# Altium PCB PCB2.PcbDoc
Units mm, origin at the board's own origin, x right, y up, seen from the top; angles counter-clockwise.
Board outline 60 x 60 mm, 2 copper layers (Top Layer, Bottom Layer); 28 components, 24 nets, 80 pads, 3 vias.
Unrouted connection lines stored in the file: 1.
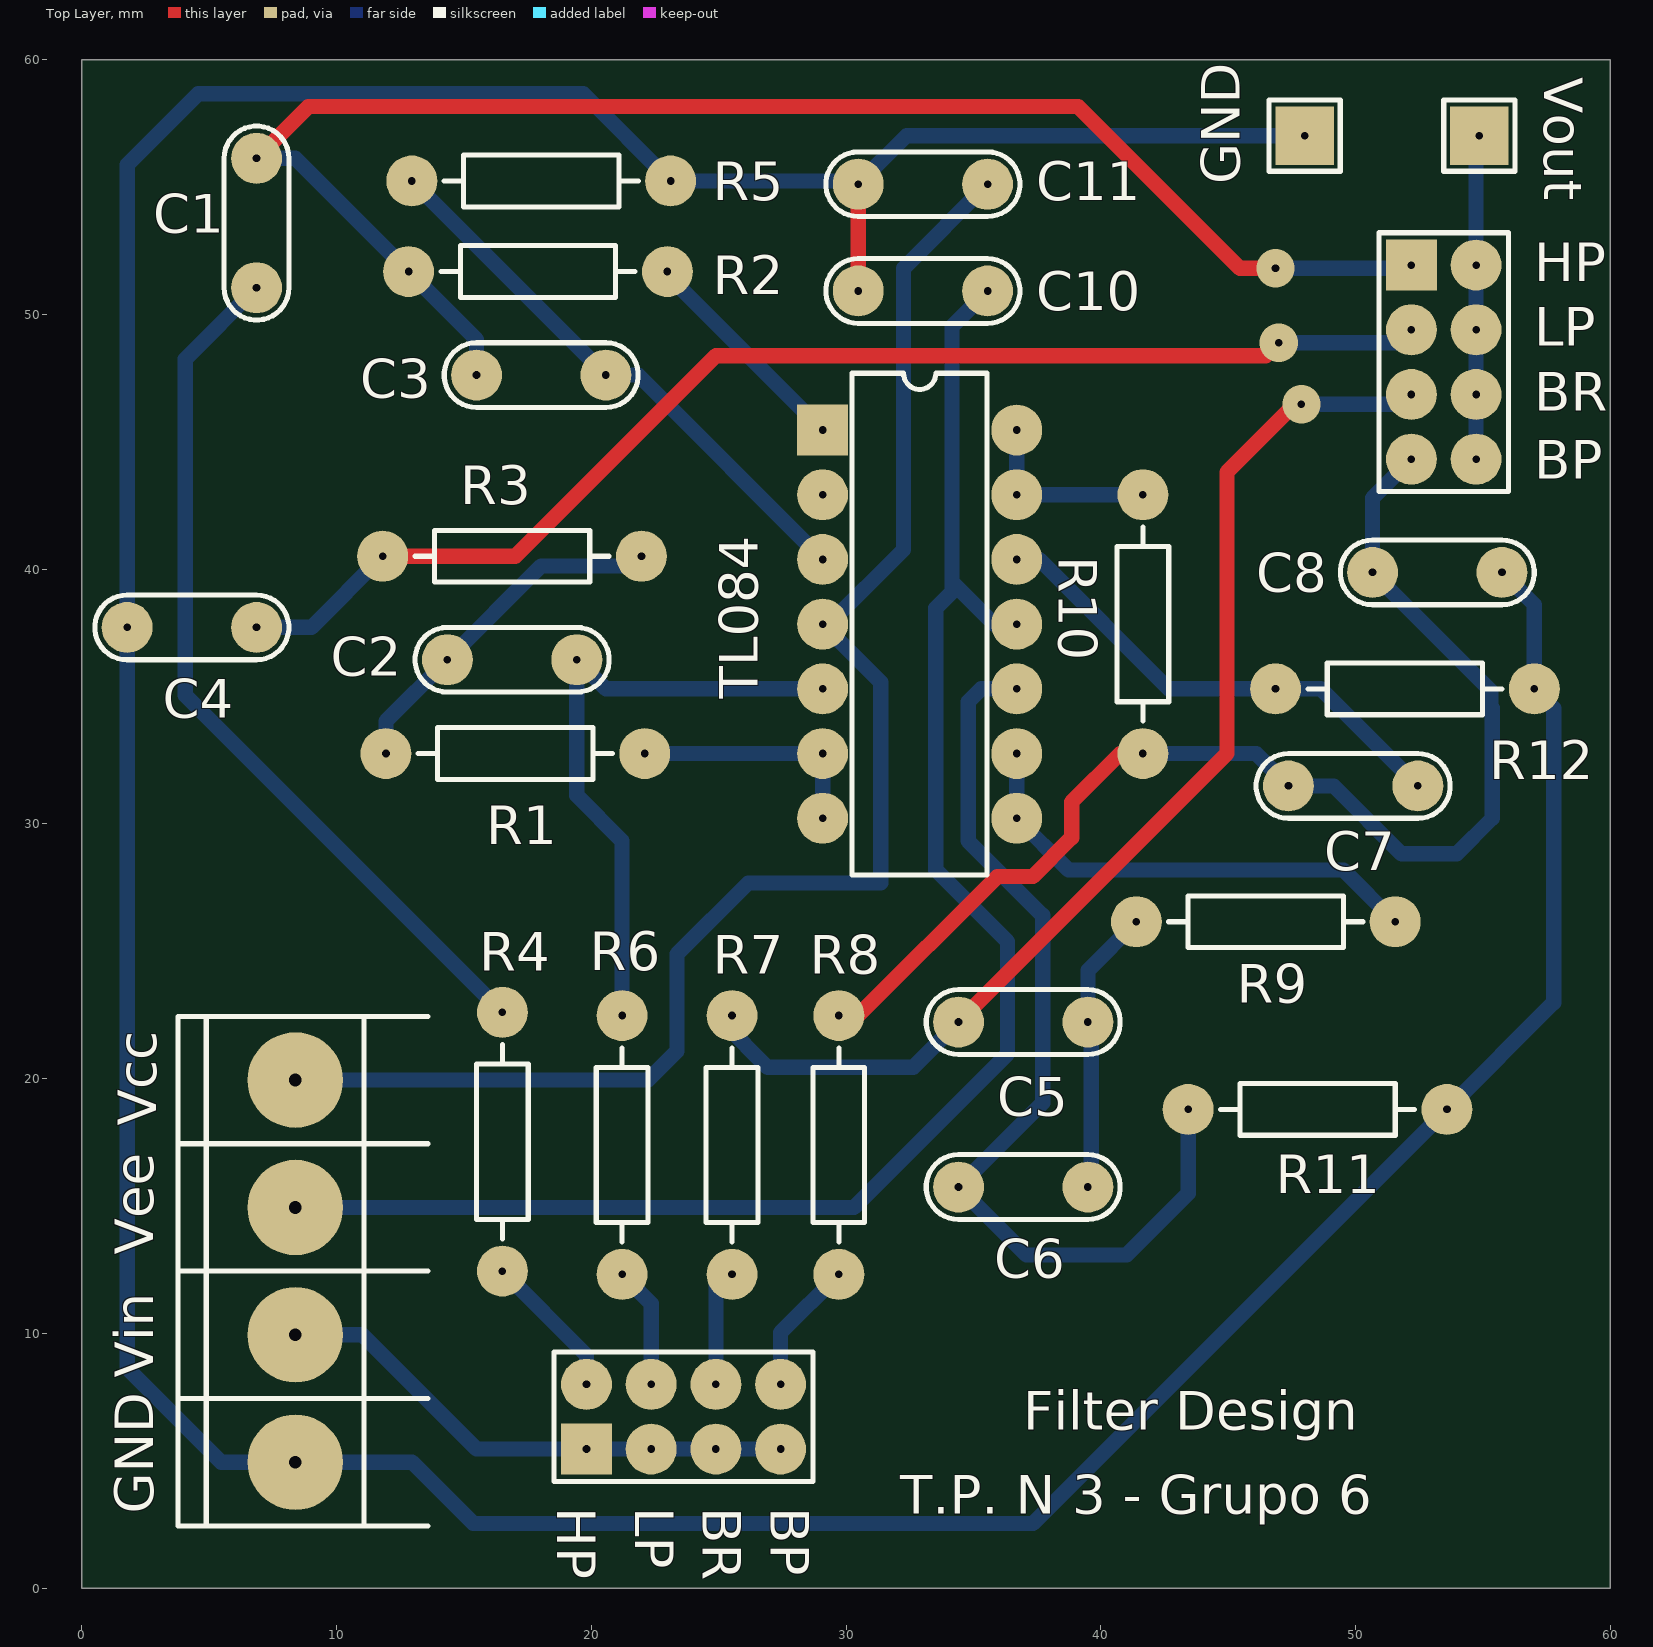
[diagram p0: Top Layer view]
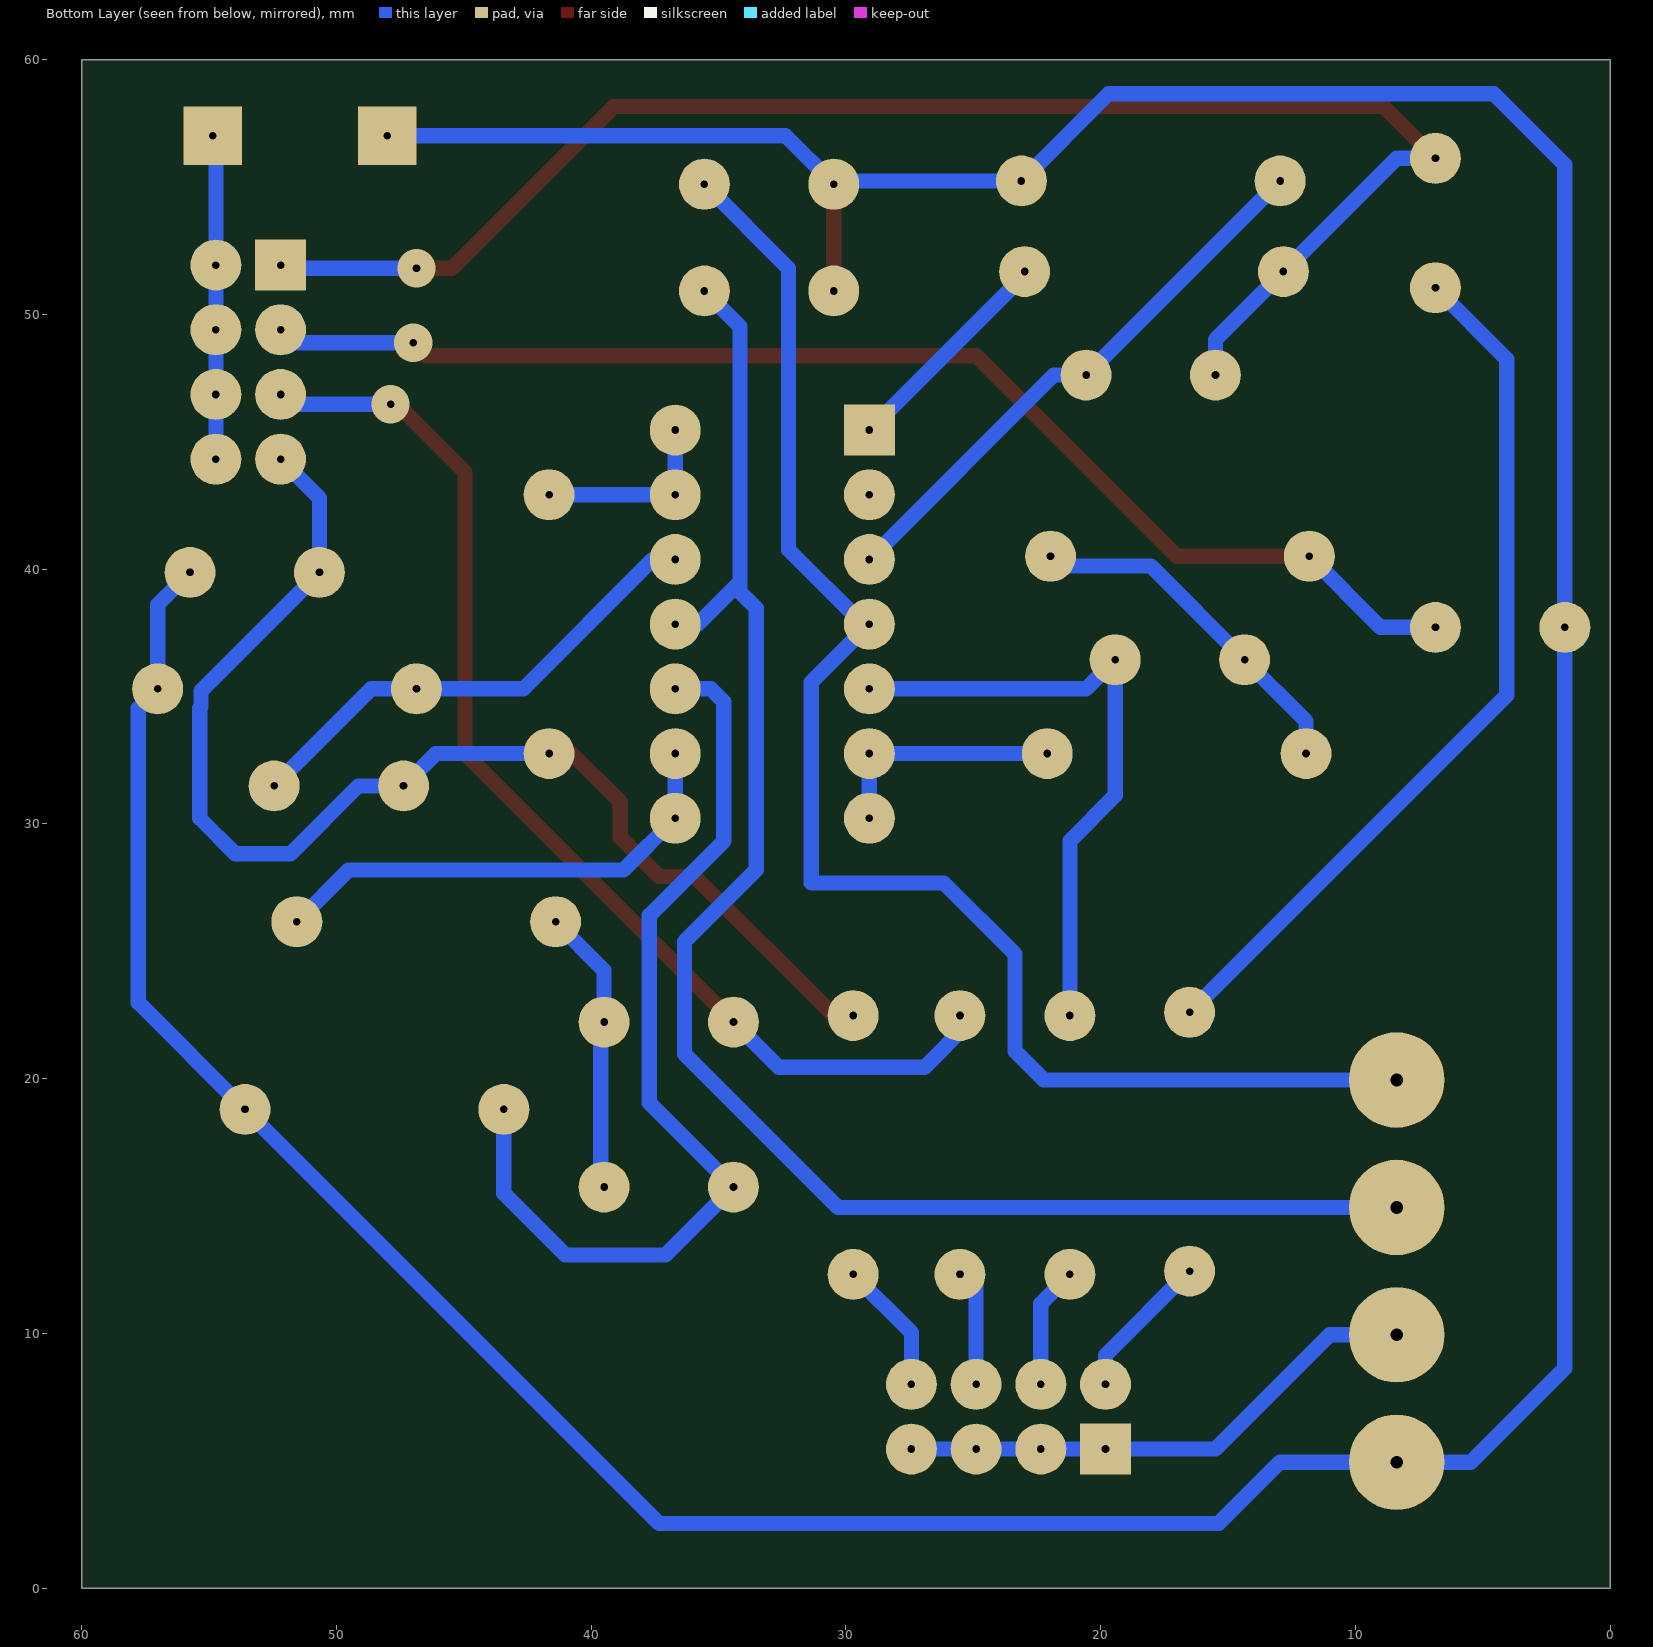
[diagram p1: Bottom Layer view, seen from below]

## Layer stack, top to bottom
Top Solder: solder mask 0.0102, Solder Resist, Dk 3.5
Top Layer: signal copper 0.0356
Dielectric 1: dielectric 0.32, FR-4, Dk 4.8
Bottom Layer: signal copper 0.0356
Bottom Solder: solder mask 0.0102, Solder Resist, Dk 3.5

## Board outline
0,0 60,0 60,60 0,60

## Design rules (kind name [scope] priority, off if disabled: settings)
Clearance [All] p1: gap=0.4
PolygonConnect [All] p1: connectstyle=Relief reliefconductorwidth=0.254 reliefentries=4 polygonreliefangle="90 Angle" airgapwidth=0.254
RoutingVias [All] p1: holewidth=0.4 width=2 viastyle="Through Hole" minholewidth=0.3 minwidth=2 maxholewidth=0.5 maxwidth=2
SolderMaskExpansion [All] p1: expansion=0.102
Width [All] p1: maxlimit=0.9 minlimit=0.6 preferedwidth=0.7
30 further rules are at their usual default settings.

## Components (designator, comment, footprint, x,y, rotation, side; value= is the part's Value field where it differs from the comment)
C1 "100nF" CAP200 6.858,53.594 r90 top
C2 "100nF" CAP200 16.891,36.449 r180 top
C3 "100nF" CAP200 18.034,47.625 r0 top
C4 "100nF" CAP200 4.318,37.719 r0 top
C5 "CAP" CAP200 36.957,22.225 r180 top
C6 "CAP" CAP200 36.957,15.748 r180 top
C7 "CAP" CAP200 49.911,31.496 r0 top
C8 "CAP" CAP200 53.213,39.878 r180 top
C10 "100nF" CAP200 33.02,50.927 r0 top
C11 "100nF" CAP200 33.02,55.118 r0 top
GND "" TPTH 48.006,57.023 r0 top (schematic designator TP2)
P1 "Header 4X2" HDR2X4 19.812,5.461 r0 top
P2 "Header 4X2" HDR2X4 52.197,51.943 r270 top
R1 "10" RES400 11.938,32.766 r0 top
R2 "10" RES400 12.827,51.689 r0 top
R3 "330" RES400 21.971,40.513 r180 top
R4 "220" RES400 16.51,12.446 r90 top
R5 "2k2" RES400 23.114,55.245 r180 top
R6 "3K3" RES400 21.209,12.319 r90 top
R7 "RES" RES400 25.527,22.479 r270 top
R8 "RES" RES400 29.718,22.479 r270 top
R9 "RES" RES400 41.402,26.162 r0 top
R10 "RES" RES400 41.656,42.926 r270 top
R11 "RES" RES400 43.434,18.796 r0 top
R12 "RES" RES400 57.023,35.306 r180 top
TL084 "TL084CN" 646-06 32.893,37.846 r270 top (schematic designator U1)
Vcc "BORNERA 4" BORNERA4 8.382,12.446 r0 top (schematic designator J1)
Vout "" TPTH 54.864,57.023 r0 top (schematic designator TP1)

## Footprints (in the part's own frame and the unit in brackets; to place one, negate y for a bottom-side part, rotate by r counter-clockwise, add the part's x,y. Pads: shape width x height; smd on the part's side, far side on the other; paste and mask are expansions set on the pad)
646-06 [mm] "DIP; 14 Leads; Row Spacing 7.62 mm; Pitch 2.54 mm"
  rect 2x2 hole 0.3: 1(-7.62,-3.81)
  round 2 hole 0.3: 2(-5.08,-3.81) 3(-2.54,-3.81) 4(0,-3.81) 5(2.54,-3.81) 6(5.08,-3.81) 7(7.62,-3.81) 8(7.62,3.81) 9(5.08,3.81) 10(2.54,3.81) 11(0,3.81) 12(-2.54,3.81) 13(-5.08,3.81) 14(-7.62,3.81)
  silkscreen extent -9.85,-2.65 9.85,2.65
BORNERA4 [mm] "Bornera con Tornillos 5mm separación"
  round 3.75 hole 0.5: 1(0,7.5) 2(0,2.5) 3(0,-2.5) 4(0,-7.5)
  silkscreen extent -4.6,-10 5.2,10, body extent -3.76,-9.89 3.94,10.61, height 10
CAP200 [mm]
  round 2 hole 0.3: 1(-2.54,0) 2(2.54,0)
  silkscreen extent -3.81,-1.27 3.81,1.27, body extent -2.79,-1.17 2.79,1.12, height 6.24
HDR2X4 [mm] "Connector; Header; 4x2 Position"
  rect 2x2 hole 0.3: 1(0,0)
  round 2 hole 0.3: 2(0,2.54) 3(2.54,0) 4(2.54,2.54) 5(5.08,0) 6(5.08,2.54) 7(7.62,0) 8(7.62,2.54)
  silkscreen extent -1.27,-1.27 8.89,3.81
RES400 [mm]
  round 2 hole 0.3: 1(0,0) 2(10.16,0)
  silkscreen extent 1.27,-1.02 8.89,1.02, body extent -0.3,-1.14 10.46,1.17, height 2.43
TPTH [mm]
  rect 2.3x2.3 hole 0.3: 1(0,0)
  silkscreen extent -1.4,-1.4 1.4,1.4, body extent -1.27,-1.27 1.27,1.27, height 6.04

## Part data
C1 C2 C3 C4 C10 C11: library part CAP
GND Vout: library part TP
P1 P2: "Header, 4-Pin, Dual row"
R1 R2 R3 R4 R5 R6: library part RES
TL084: "JFET-Input Operational Amplifier"

## Via types
v1: diameter 1.5, hole 0.3, Top Layer to Bottom Layer, 3 vias

## Nets (pads, with @x,y where several pads share a name; then routed paths per layer and width w, separated by ;. In a path a pad name is that pad's centre, name@x,y a point inside that pad or via, vN(x,y) a via of type N, cw(c..) or ccw(c..) an arc to the next point about the centre after c; other vN are vias at no path point)
BP: C7.1 C8.2 P2.7 R8.1 R10.2 | length 49.6
  Top Layer w0.6: R8.1 30.48,22.479 35.941,27.94 37.338,27.94 38.862,29.464 38.862,30.861 40.767,32.766 R10.2
  Bottom Layer w0.6: R10.2 46.101,32.766 C7.1 49.149,31.496 51.816,28.829 53.975,28.829 55.372,30.226 55.372,34.553 55.323,34.602 55.323,35.228 C8.2 50.673,42.799 P2.7
BR: C5.2 P2.5 R7.1 | length 45.1
  Top Layer w0.6: C5.2 44.958,32.766 44.958,43.815 47.625,46.482 v1(47.879,46.482)
  Bottom Layer w0.6: R7.1@25.209,22.162 26.924,20.447 32.639,20.447 C5.2 ; v1(47.879,46.482) 51.816,46.482 P2.5
GND: C4.1 C8.1 C10.1 C11.1 GND.1 R5.1 R11.2 R12.1 Vcc.4 | length 185.6
  Top Layer w0.6: C10.1 C11.1
  Bottom Layer w0.6: C11.1@30.353,55.245 R5.1 19.685,58.674 4.572,58.674 1.778,55.88 C4.1 1.778,8.636 5.468,4.946 Vcc.4 12.961,4.946 15.367,2.54 37.338,2.54 R11.2 57.785,22.987 57.785,34.544 R12.1 57.023,38.608 C8.1 ; C11.1 32.385,57.023 GND.1
HP: C1.2 C3.1 P2.1 R2.1 | length 61.7
  Top Layer w0.6: C1.2 8.89,58.166 39.116,58.166 45.466,51.816 v1(46.863,51.816)
  Bottom Layer w0.6: C1.2 8.382,56.134 R2.1 15.494,49.022 C3.1 ; v1(46.863,51.816) P2.1@52.07,51.816
LP: C4.2 P2.3 R3.2 | length 50.2
  Top Layer w0.6: R3.2 17.018,40.513 24.892,48.387 46.482,48.387 v1(46.99,48.895)
  Bottom Layer w0.6: C4.2 9.017,37.719 R3.2 ; v1(46.99,48.895) 51.689,48.895 P2.3
NetC1_1: C1.1 R4.2 | length 34.8
  Bottom Layer w0.6: C1.1 4.064,48.26 4.064,35.052 R4.2
NetC2_1: C2.1 R6.2 TL084.5 | length 24.8
  Bottom Layer w0.6: R6.2 21.209,29.337 19.431,31.115 C2.1 20.574,35.306 TL084.5
NetC2_2: C2.2 R1.1 R3.1 | length 13.4
  Bottom Layer w0.6: R1.1 11.938,34.036 C2.2 18.034,40.132 R3.1@21.59,40.132
NetC3_2: C3.2 R5.2 TL084.3 | length 22.3
  Bottom Layer w0.6: R5.2 C3.2 21.844,47.625 TL084.3
NetC5_1: C5.1 C6.1 R9.1 | length 11.1
  Bottom Layer w0.6: C5.1 39.497,24.257 R9.1 ; C6.1@39.624,15.748 C5.1@39.624,22.098
NetC6_2: C6.2 R11.1 TL084.10 | length 38.2
  Bottom Layer w0.6: TL084.10 35.306,35.306 34.798,34.798 34.798,29.337 37.719,26.416 37.719,19.05 C6.2 37.084,13.081 41.021,13.081 43.434,15.494 R11.1
NetC7_2: C7.2 R12.2 TL084.12 | length 19.4
  Bottom Layer w0.6: TL084.12 37.592,40.386 42.672,35.306 R12.2 48.641,35.306 C7.2
NetP1_2: P1.2 R4.1 | length 5.8
  Bottom Layer w0.6: R4.1 19.812,9.144 P1.2
NetP1_4: P1.4 R6.1 | length 4.8
  Bottom Layer w0.6: R6.1 22.352,11.176 P1.4
NetP1_6: P1.6 R7.2 | length 4.1
  Bottom Layer w0.6: P1.6 R7.2@24.892,12.065
NetP1_8: P1.8 R8.2 | length 5.3
  Bottom Layer w0.6: P1.8 27.432,10.033 R8.2
NetR1_2: R1.2 TL084.6 TL084.7 | length 9.5
  Bottom Layer w0.6: R1.2 TL084.6 TL084.7
NetR2_2: R2.2 TL084.1 TL084.2 | length 8.7
  Bottom Layer w0.6: R2.2 22.987,51.562 TL084.1
NetR9_2: R9.2 TL084.8 TL084.9 | length 19.1
  Bottom Layer w0.6: TL084.9 TL084.8 38.735,28.194 49.53,28.194 R9.2
NetR10_1: R10.1 TL084.13 TL084.14 | length 7.5
  Bottom Layer w0.6: TL084.14 TL084.13 R10.1
VCC: C11.2 TL084.4 Vcc.1 | length 59.6
  Bottom Layer w0.6: Vcc.1 22.232,19.946 23.368,21.082 23.368,24.892 26.162,27.686 31.369,27.686 31.369,35.56 TL084.4 29.337,37.846 32.258,40.767 32.258,51.816 C11.2
VEE: C10.2 TL084.11 Vcc.2 | length 65.6
  Bottom Layer w0.6: Vcc.2 30.313,14.946 36.338,20.971 36.338,25.384 33.528,28.194 33.528,38.481 34.163,39.116 34.163,49.53 C10.2 ; 34.163,39.497 35.814,37.846 TL084.11
VIN: P1.1 P1.3 P1.5 P1.7 Vcc.3 | length 22.4
  Bottom Layer w0.6: Vcc.3@6.858,9.946 11.009,9.946 15.494,5.461 P1.1 P1.3 P1.5 P1.7
VOUT: P2.2 P2.4 P2.6 P2.8 Vout.1 | length 12.7
  Bottom Layer w0.6: P2.8 P2.6 P2.4 P2.2 Vout.1@54.737,57.023

## Silkscreen, mask and mechanical layers (free items; w line width, h text height)
Top Overlay:
  text "HP" at 57.023,51.308 h1.52
  text "LP" at 57.023,48.768 h1.52
  text "BR" at 57.023,46.228 h1.52
  text "BP" at 57.023,43.561 h1.52
  text "Vee" at 2.794,13.081 h1.52 r90
  text "Vin" at 2.794,8.255 h1.52 r90
  text "Filter Design" at 36.957,6.223 h1.52
  text "HP" at 18.669,3.175 h1.52 r270
  text "LP" at 21.717,3.175 h1.52 r270
  text "BR" at 24.384,3.175 h1.52 r270
  text "BP" at 27.051,3.175 h1.52 r270
  text "GND" at 2.794,2.921 h1.52 r90
  text "T.P. N 3 - Grupo 6" at 32.131,2.921 h1.52